# Altium PCB xdip_matching_balun.PcbDoc
Units mm, origin at the board's own origin, x right, y up, seen from the top; angles counter-clockwise.
Board outline 60 x 50 mm, 4 copper layers (Top Layer, Signal Layer 1, Signal Layer 2, Bottom Layer), stack 0.599 mm thick; 20 components, 9 nets, 64 pads, 114 vias.
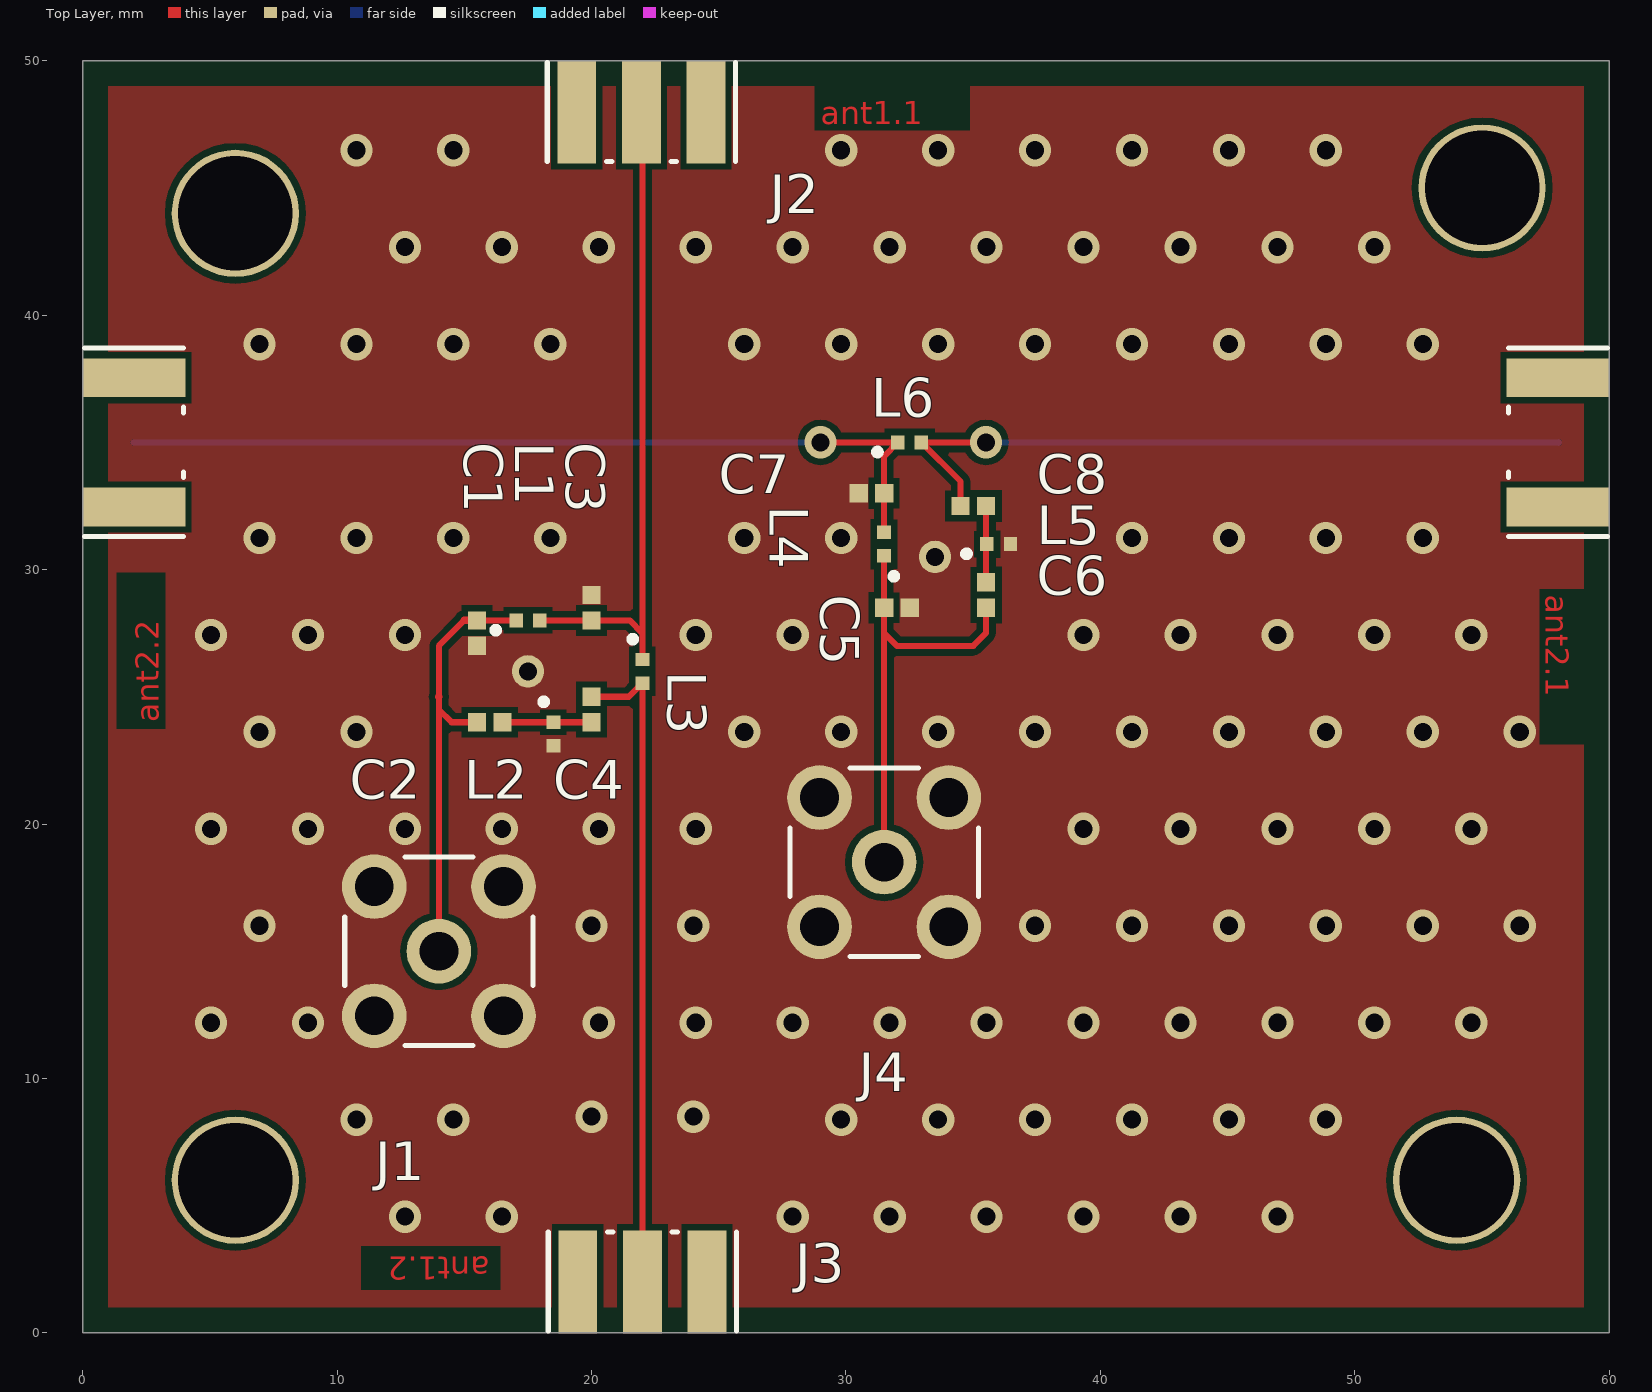
[diagram p0: Top Layer view]
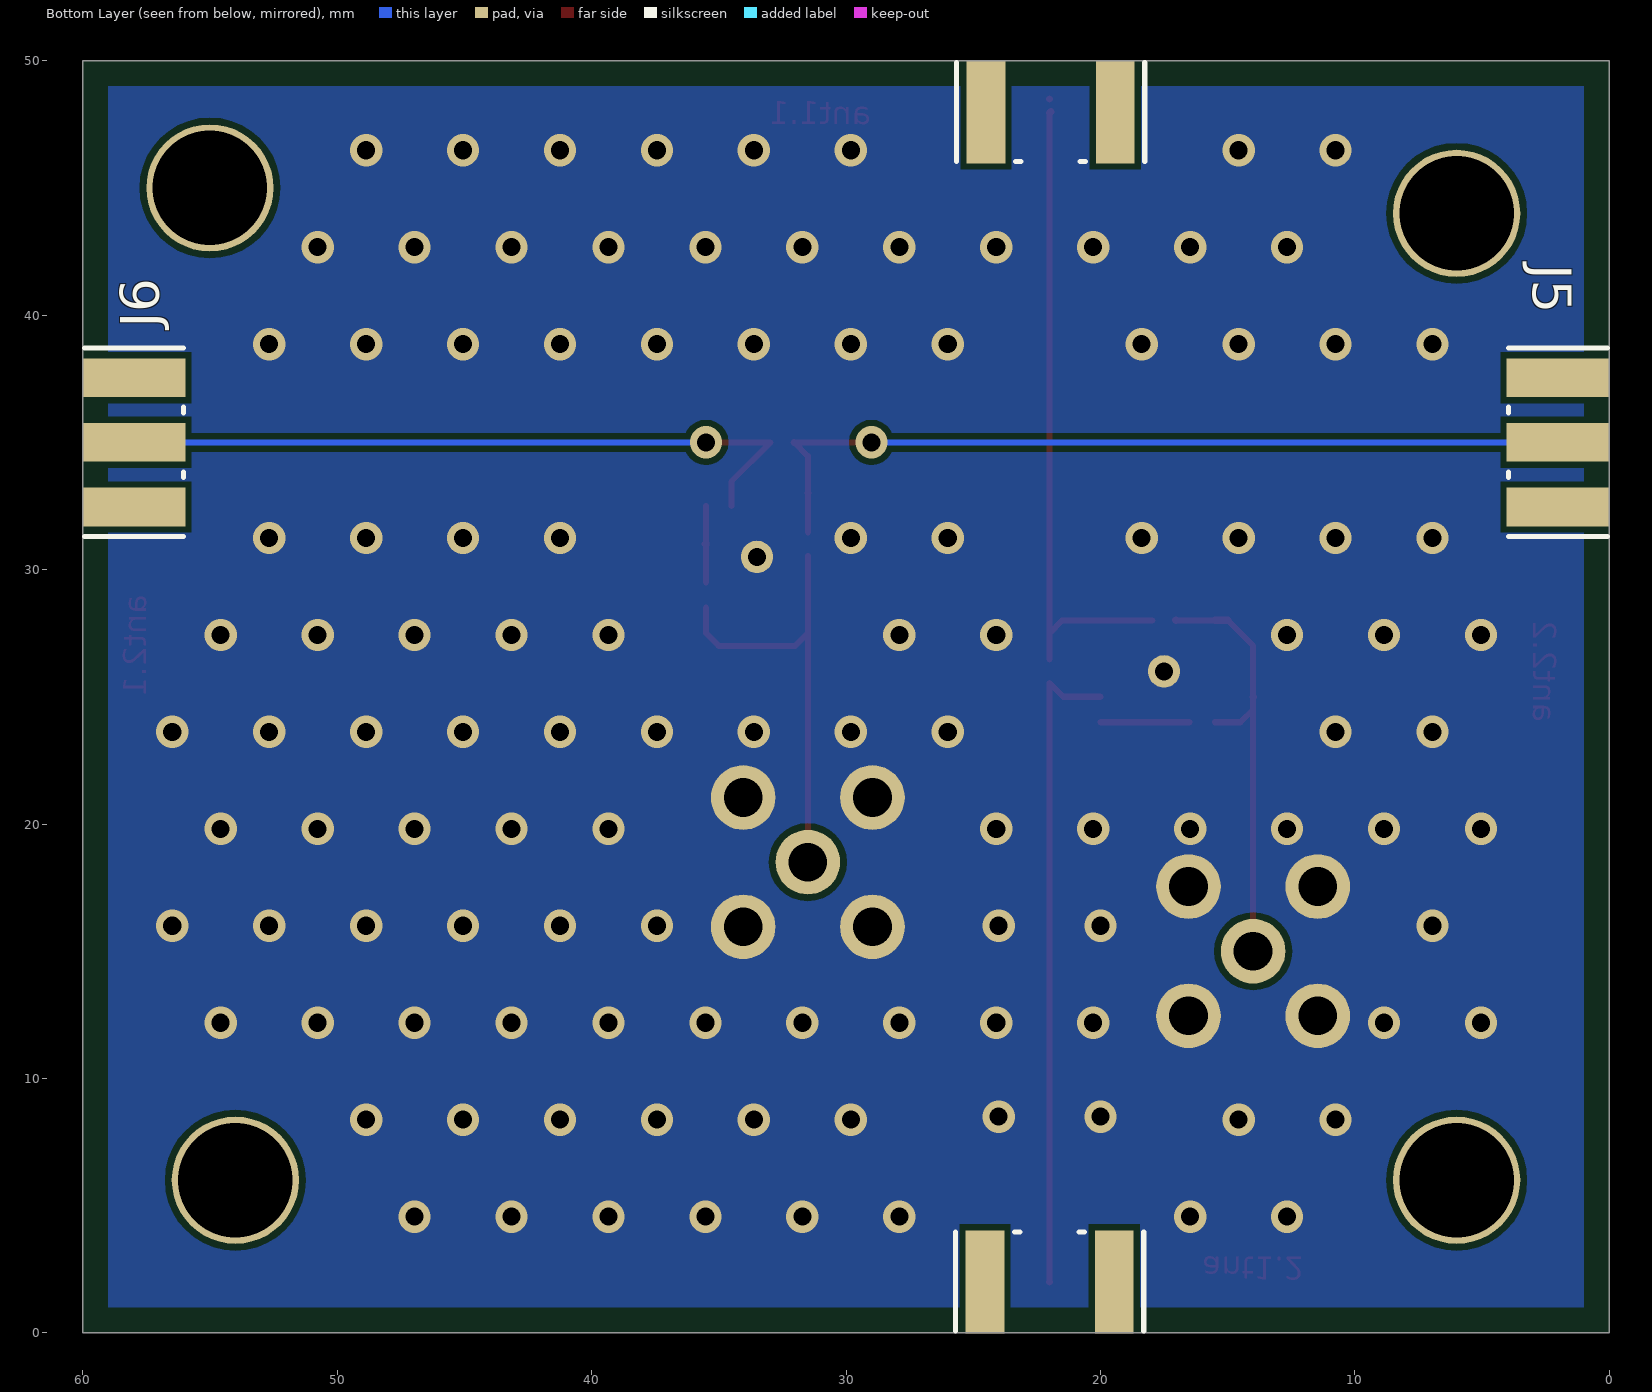
[diagram p1: Bottom Layer view, seen from below]
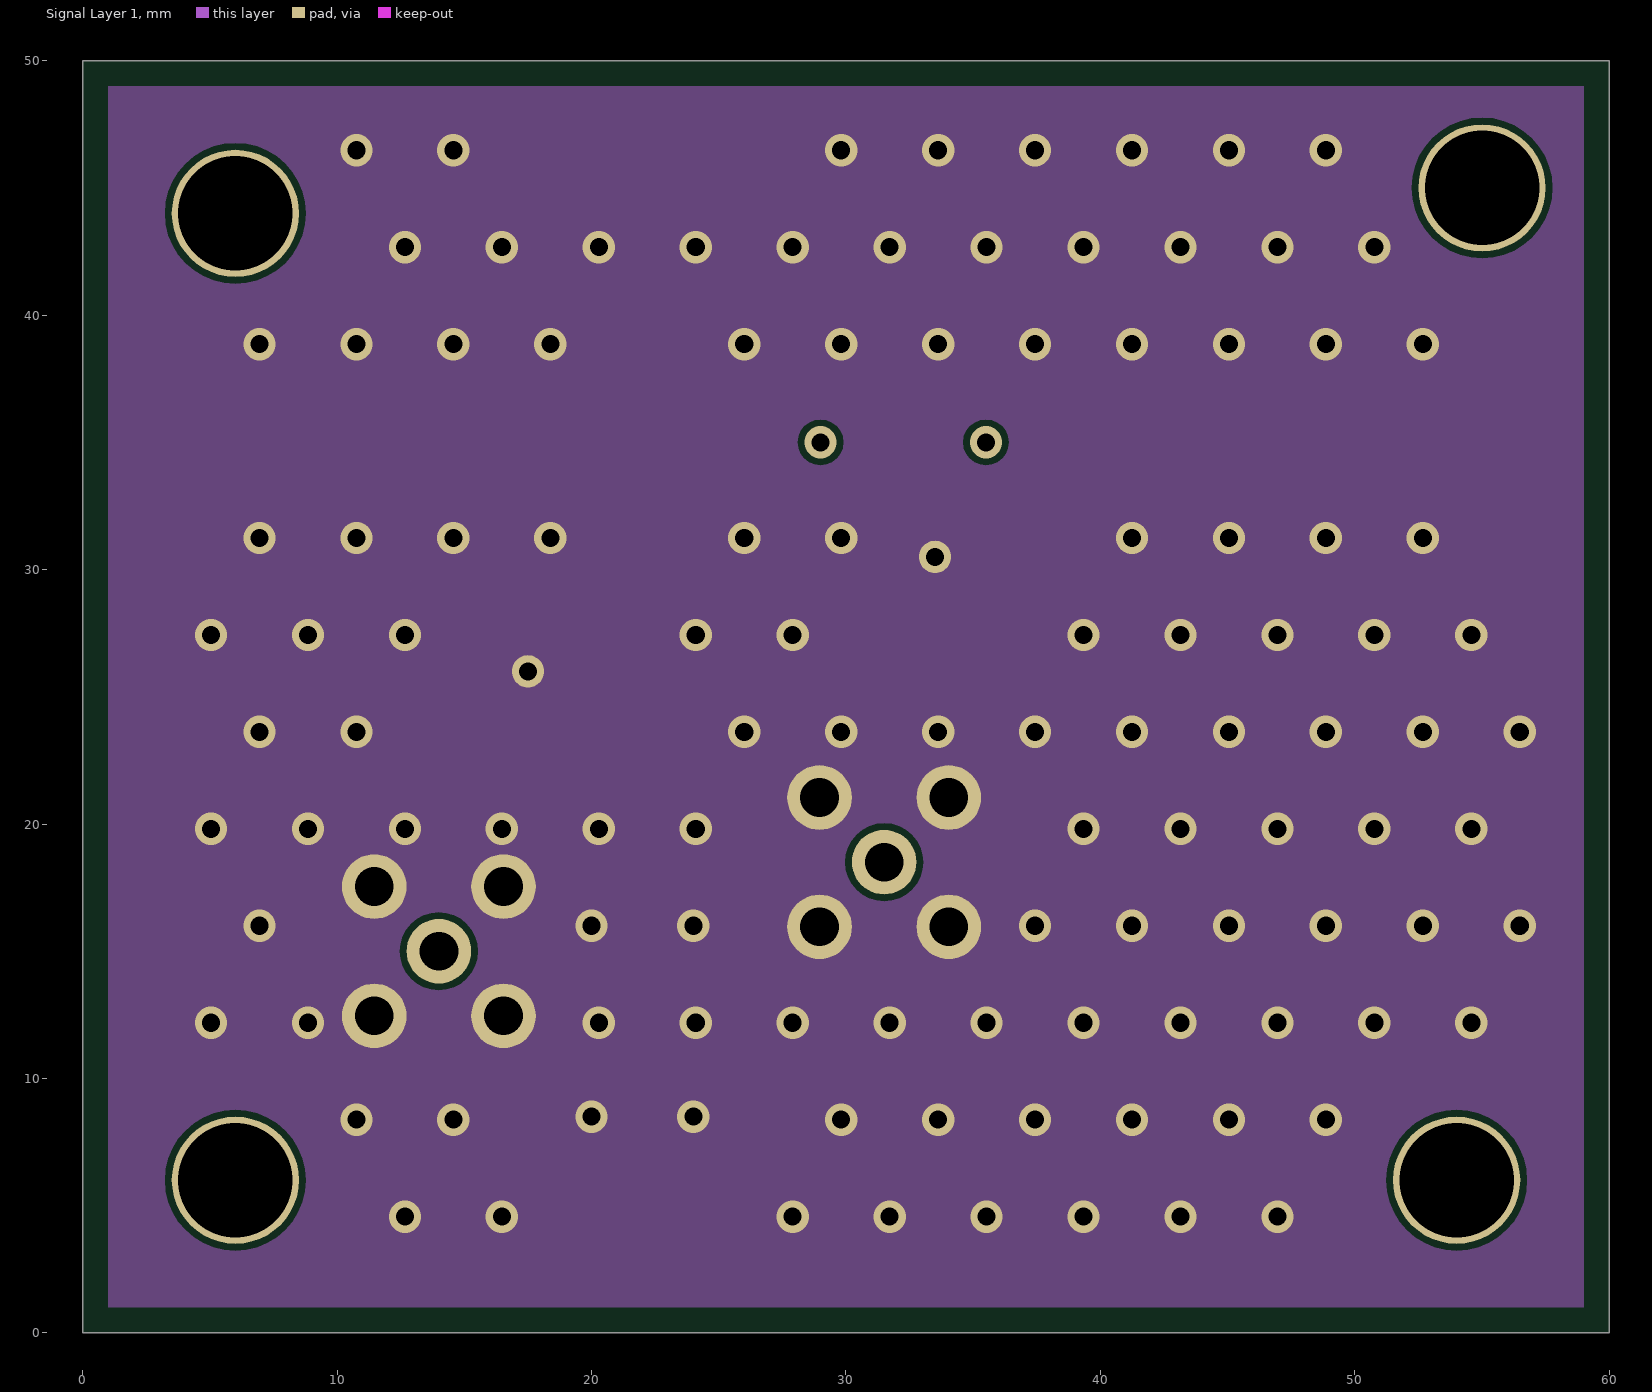
[diagram p2: Signal Layer 1]
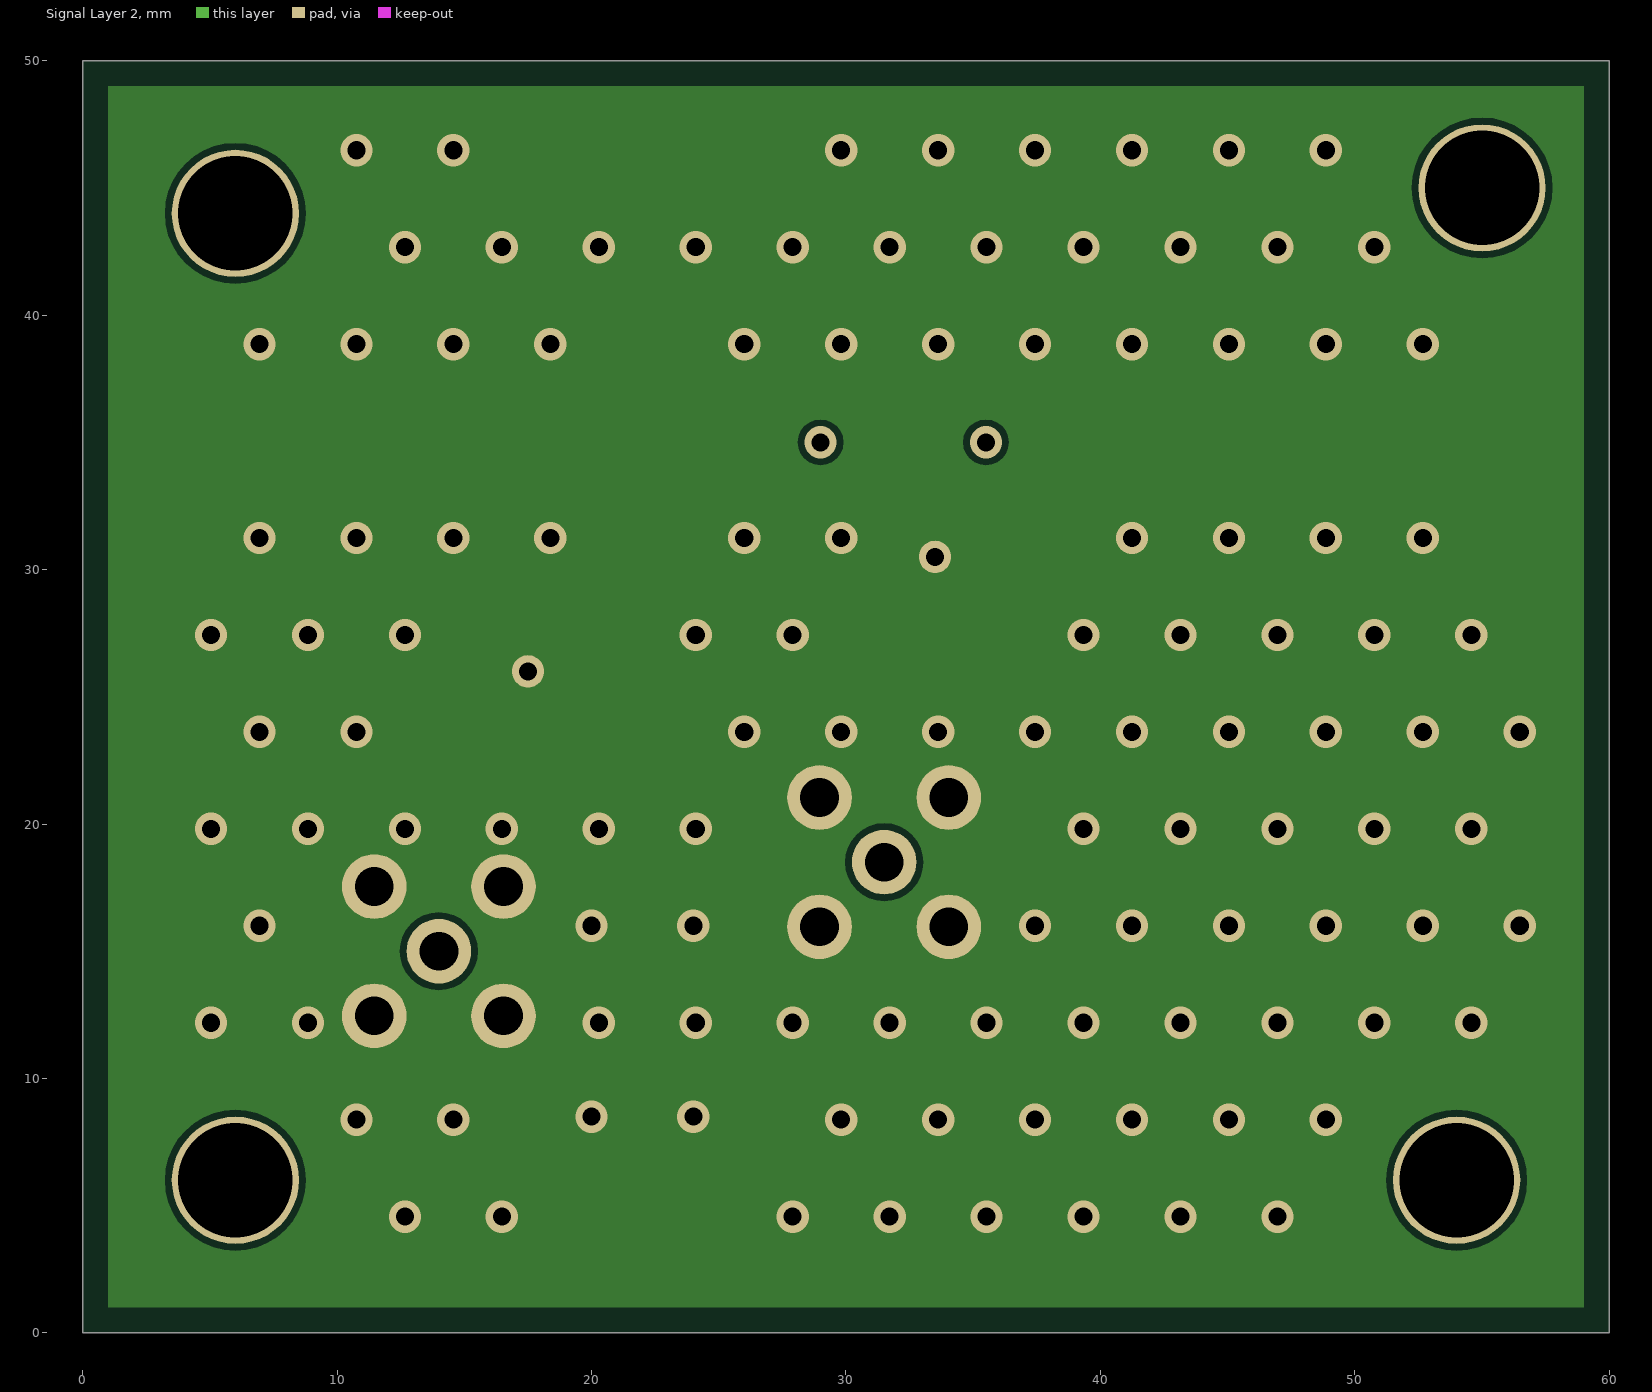
[diagram p3: Signal Layer 2]

## Layer stack, top to bottom
Top Solder: solder mask 0.0102, Solder Resist, Dk 3.5
Top Layer: signal copper 0.0356
Dielectric 1: prepreg 0.1016, RO4450f, Dk 4.2
Signal Layer 1: signal copper 0.0356
Dielectric 3: core 0.254, FR-4, Dk 4.2
Signal Layer 2: signal copper 0.0356
Dielectric 2: prepreg 0.1016, RO4450f, Dk 4.2
Bottom Layer: signal copper 0.0356
Bottom Solder: solder mask 0.0102, Solder Resist, Dk 3.5

## Board outline
0,0 60,0 60,50 0,50

## Design rules (kind name [scope] priority, off if disabled: settings)
Clearance "Stitching GND" [IsStitchingVia and InNet('GND') vs (IsVia and (Not IsStitchingVia)) Or IsPad] p1: gap=0.254
Clearance [All] p2: gap=0.254
PlaneConnect [All] p1: planeconnectstyle=Direct reliefexpansion=0.508 reliefentries=4 reliefconductorwidth=0.254 reliefairgap=0.254
PolygonConnect [All] p1: connectstyle=Direct reliefconductorwidth=0.254 reliefentries=4 polygonreliefangle="90 Angle" airgapwidth=0.254
RoutingVias [All] p1: holewidth=0.711 width=1.27 viastyle="Through Hole" minholewidth=0.711 minwidth=1.27 maxholewidth=0.711 maxwidth=1.27
SolderMaskExpansion [All] p1: expansion=0.102
Width [All] p1: maxlimit=0.242 minlimit=0.24 preferedwidth=0.241
29 further rules are at their usual default settings.

## Components (designator, comment, footprint, x,y, rotation, side; value= is the part's Value field where it differs from the comment)
C1 "CAP 18pF 50V 0402(1005)" CAPC0402(1005)60_M 15.5,27.5 r270 top
C2 "CAP 18pF 50V 0402(1005)" CAPC0402(1005)60_M 16,24 r0 top
C3 "CAP 18pF 50V 0402(1005)" CAPC0402(1005)60_M 20,28.5 r90 top
C4 "CAP 18pF 50V 0402(1005)" CAPC0402(1005)60_M 20,24.5 r90 top
C5 "CAP 4.1pF 50V 0402(1005)" CAPC0402(1005)60_M 32,28.5 r0 top
C6 "CAP 4.1pF 50V 0402(1005)" CAPC0402(1005)60_M 35.5,29 r90 top
C7 "CAP 4.1pF 50V 0402(1005)" CAPC0402(1005)60_M 31,33 r180 top
C8 "CAP 4.1pF 50V 0402(1005)" CAPC0402(1005)60_M 35,32.5 r180 top
J1 "CONSMA008" CON-SMA-L 14,15 r0 top
J2 "CONSMA003.062" CON-SMA-EDGE062 21.96,48 r90 top
J3 "CONSMA003.062" CON-SMA-EDGE062 22,2 r270 top
J4 "CONSMA008" CON-SMA-L 31.5,18.5 r180 top
J5 "CONSMA003.062" CON-SMA-EDGE062 2,35 r180 bottom
J6 "CONSMA003.062" CON-SMA-EDGE062 58,35 r0 bottom
L1 "FIXED IND 68NH 250MA 920 MOHM" MURA-IND0402_V 17.5,28 r180 top
L2 "FIXED IND 68NH 250MA 920 MOHM" MURA-IND0402_V 18.5,23.537 r90 top
L3 "FIXED IND 430NH 70MA 960 MOHM" MURA-IND0402_V 22,26 r90 top
L4 "FIXED IND 33NH 350MA 580 MOHM" MURA-IND0402_V 31.5,31 r270 top
L5 "FIXED IND 33NH 350MA 580 MOHM" MURA-IND0402_V 36,31 r180 top
L6 "FIXED IND 39NH 300MA 650 MOHM" MURA-IND0402_V 32.5,35 r180 top

## Footprints (in the part's own frame and the unit in brackets; to place one, negate y for a bottom-side part, rotate by r counter-clockwise, add the part's x,y. Pads: shape width x height; smd on the part's side, far side on the other; paste and mask are expansions set on the pad)
CAPC0402(1005)60_M [mm] "Chip Capacitor, Body 1.0x0.5mm, Height 0.6mm, IPC Low Density"
  rect 0.72x0.72 smd: 1(-0.5,0) 2(0.5,0)
  body extent -0.55,-0.3 0.55,0.3, height 0.6
CON-SMA-EDGE062 [mil] "Connector, SMA Female Edge Mount for 0.062\" Thick Board, 5-Lead, Body Dia. 7.9mm"
  rect 160x60 smd: 1(0,0) 2(0,-100) 5(0,100)
  rect 160x60 smd far side: 3(0,-100) 4(0,100)
  silkscreen extent -77,-146 76,146, body extent -77,-163 387,163, height 187
CON-SMA-L [mil] "Connector, SMA Female Extended, 5-Lead, Thru-Hole, Straight, Body 7x7mm"
  round 100 hole 60: 1(0,0) 2(-100,100) 3(100,100) 4(100,-100) 5(-100,-100)
  silkscreen extent -146,-146 146,146
MURA-IND0402_V [mm] "SMT Inductor, 2 Leads, Body 1x0.5 mm"
  rect 0.525x0.55 smd: 1(0.463,0) 2(-0.462,0)
  silkscreen extent 1.14,0.26 1.39,0.51, body extent -0.5,-0.25 0.5,0.25, height 0.55

## Part data
C1 C2 C3 C4: library part CMP-1034-00862-1, "CAP 18pF 50V ±1% 0402 (1005 Metric) Thickness 0.6mm SMD"
C5 C6 C7 C8: library part CMP-1034-00324-1, "CAP 4.1pF 50V ±0.1pF 0402 (1005 Metric) Thickness 0.6mm SMD"
J1 J4: library part CMP-0168-00003-1, "SMA Female PCB Mount Connector - Extended"
J2 J3 J5 J6: library part CMP-0168-00029-1, "SMA Female Edge Mount Connector for 0.062\" Thick Board"
L1 L2 L3 L4 L5 L6: library part CMP-0499-00001-3, "Chip Inductor (Chip Coil) for High Frequency Multilayer, 2 +/- 0.3 nH, 300 mA, 0402 (1005), 180mm Paper Tape"

## Free pads (board coordinates)
  round 1.27 hole 0.711: 324(33.5,30.5) 325(17.5,26)
  round 5 hole 4.5: 326(6,6) 326(6,44) 326(54,6) 326(55,45)

## Via types
v1: diameter 1.27, hole 0.711, Top Layer to Bottom Layer, 114 vias

## Nets (pads, with @x,y where several pads share a name; then routed paths per layer and width w, separated by ;. In a path a pad name is that pad's centre, name@x,y a point inside that pad or via, vN(x,y) a via of type N, cw(c..) or ccw(c..) an arc to the next point about the centre after c; other vN are vias at no path point)
GND: C1.2 C3.2 C5.2 C7.2 J1.2 J1.3 J1.4 J1.5 J4.2 J4.3 J4.4 J4.5 L2.2 L5.2 pad.324 pad.325
  other v1: 12.665,4.57 16.475,4.57 27.905,4.57 31.715,4.57 35.525,4.57 39.335,4.57 43.145,4.57 46.955,4.57 10.76,8.38 14.57,8.38 29.81,8.38 33.62,8.38 37.43,8.38 41.24,8.38 45.05,8.38 48.86,8.38 20,8.5 24,8.5 5.045,12.19 8.855,12.19 20.285,12.19 24.095,12.19 27.905,12.19 31.715,12.19 35.525,12.19 39.335,12.19 43.145,12.19 46.955,12.19 50.765,12.19 54.575,12.19 6.95,16 20,16 24,16 37.43,16 41.24,16 45.05,16 48.86,16 52.67,16 56.48,16 5.045,19.81 8.855,19.81 12.665,19.81 16.475,19.81 20.285,19.81 24.095,19.81 39.335,19.81 43.145,19.81 46.955,19.81 50.765,19.81 54.575,19.81 6.95,23.62 10.76,23.62 26,23.62 29.81,23.62 33.62,23.62 37.43,23.62 41.24,23.62 45.05,23.62 48.86,23.62 52.67,23.62 56.48,23.62 5.045,27.43 8.855,27.43 12.665,27.43 24.095,27.43 27.905,27.43 39.335,27.43 43.145,27.43 46.955,27.43 50.765,27.43 54.575,27.43 6.95,31.24 10.76,31.24 14.57,31.24 18.38,31.24 26,31.24 29.81,31.24 41.24,31.24 45.05,31.24 48.86,31.24 52.67,31.24 6.95,38.86 10.76,38.86 14.57,38.86 18.38,38.86 26,38.86 29.81,38.86 33.62,38.86 37.43,38.86 41.24,38.86 45.05,38.86 48.86,38.86 52.67,38.86 12.665,42.67 16.475,42.67 20.285,42.67 24.095,42.67 27.905,42.67 31.715,42.67 35.525,42.67 39.335,42.67 43.145,42.67 46.955,42.67 50.765,42.67 10.76,46.48 14.57,46.48 29.81,46.48 33.62,46.48 37.43,46.48 41.24,46.48 45.05,46.48 48.86,46.48
NetC1_1: C1.1 C2.1 J1.1 L1.1 | length 17.2
  Top Layer w0.241: J1.1 14,24.5 ; 15,28 14,27 14,25 14,24.5 ; C2.1 14.5,24 14,24.5 ; C1.1 L1.1
  Top Layer w0.295: 15,28 C1.1
NetC2_2: C2.2 C4.1 L2.1 | length 3.5
  Top Layer w0.241: C2.2 L2.1 C4.1
NetC3_1: C3.1 J2.1 L1.2 L3.1 | length 25.8
  Top Layer w0.241: L1.2 C3.1 21.5,28 22,27.5 ; L3.1 22,27.5 ; J2.1@22,47.96 22,27.5
  Top Layer w0.295: J2.1 J2.1@22,47.96
NetC4_2: C4.2 J3.1 L3.2 | length 25.8
  Top Layer w0.241: C4.2 21.462,25 L3.2 J3.1
NetC5_1: C5.1 C6.1 J4.1 L4.1 | length 17.5
  Top Layer w0.241: J4.1 31.5,27.5 ; L4.1 C5.1 31.5,27.5 ; C6.1 35.5,27.5 35,27 32,27 31.5,27.5
NetC6_2: C6.2 C8.1 L5.1 | length 3
  Top Layer w0.241: C6.2 L5.1@35.5,30.962 ; L5.1@35.5,31.037 C8.1
  Top Layer w0.277: L5.1@35.5,30.962 L5.1 L5.1@35.5,31.037
NetC7_1: C7.1 J5.1 L4.2 L6.1 | length 33.8
  Top Layer w0.241: v1(29,35) L6.1 31.5,34.462 C7.1 L4.2
  Bottom Layer w0.241: J5.1 v1(29,35)
NetC8_2: C8.2 J6.1 L6.2 | length 28.2
  Top Layer w0.241: C8.2 34.5,33.462 L6.2 v1(35.5,35)
  Bottom Layer w0.241: v1(35.5,35) J6.1
pads on no net: J2.2 J2.3 J2.4 J2.5 J3.2 J3.3 J3.4 J3.5 J5.2 J5.3 J5.4 J5.5 J6.2 J6.3 J6.4 J6.5

## Polygon pours and split planes (outlines as drawn)
GND on Bottom Layer "GND" (solid, pour order 30): 1,49 1,1 59,1 59,49
GND on Signal Layer 2 "GND" (solid, pour order 28): 1,49 59,49 59,1 1,1
GND on Signal Layer 1 "GND" (solid, pour order 26): 1,49 59,49 59,1 1,1
GND on Top Layer "GND" (solid, pour order 40): 1,49 59,49 59,1 1,1
no net on Mechanical 1 "BoardShape" (solid): 60,50 60,0.5 60,0 0,0 0,50

## Other copper
Top Layer:
  text "ant1.1" at 29,47.5 h0.9
  text "ant2.1" at 57.5,29 h0.9 r270
  text "ant2.2" at 3,24 h0.9 r90
  text "ant1.2" at 16,3 h0.9 r180